# EAGLE board RF-STM32 v67 (EAGLE 9.7.0)
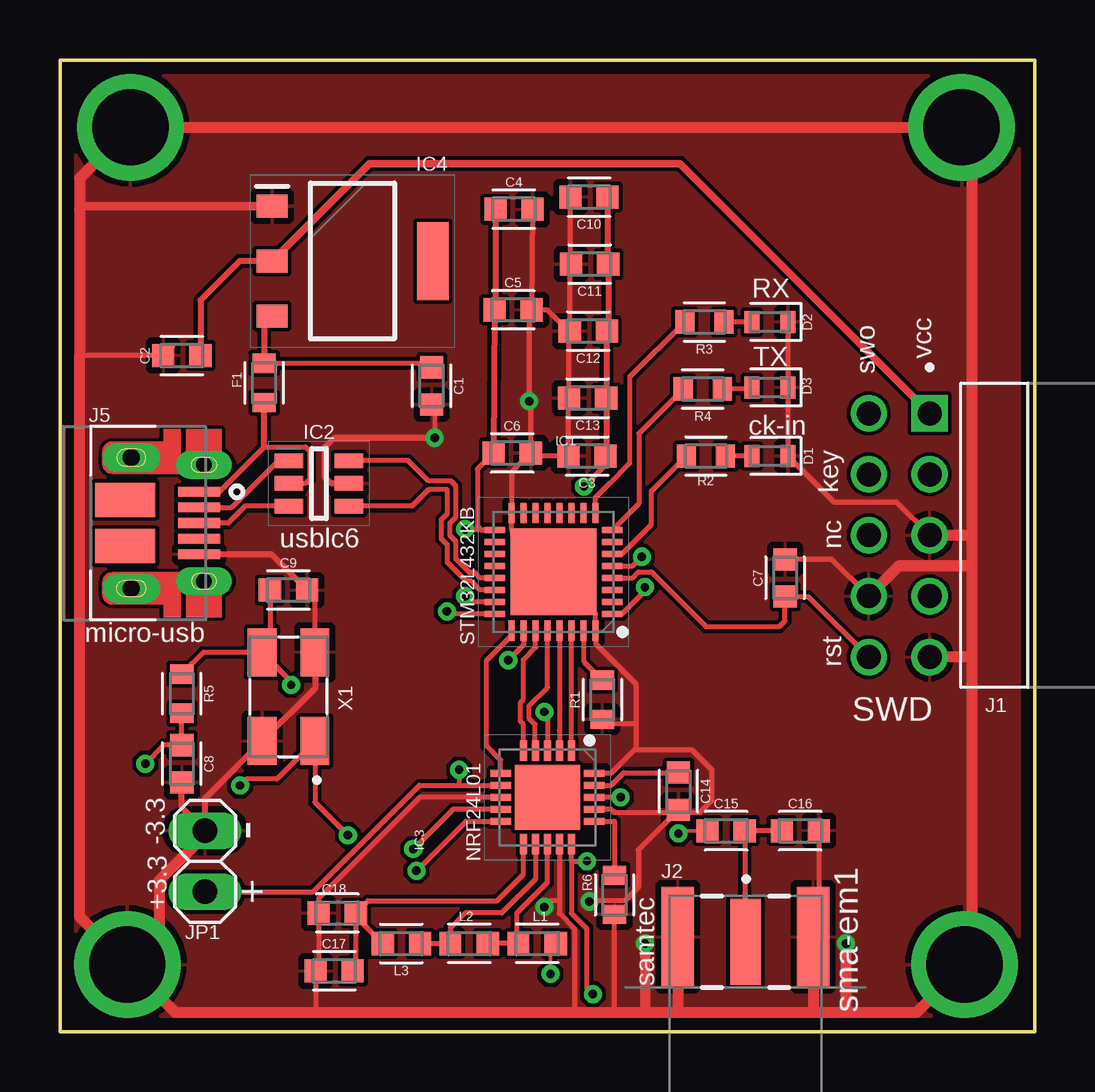
[diagram p0: board, top side]
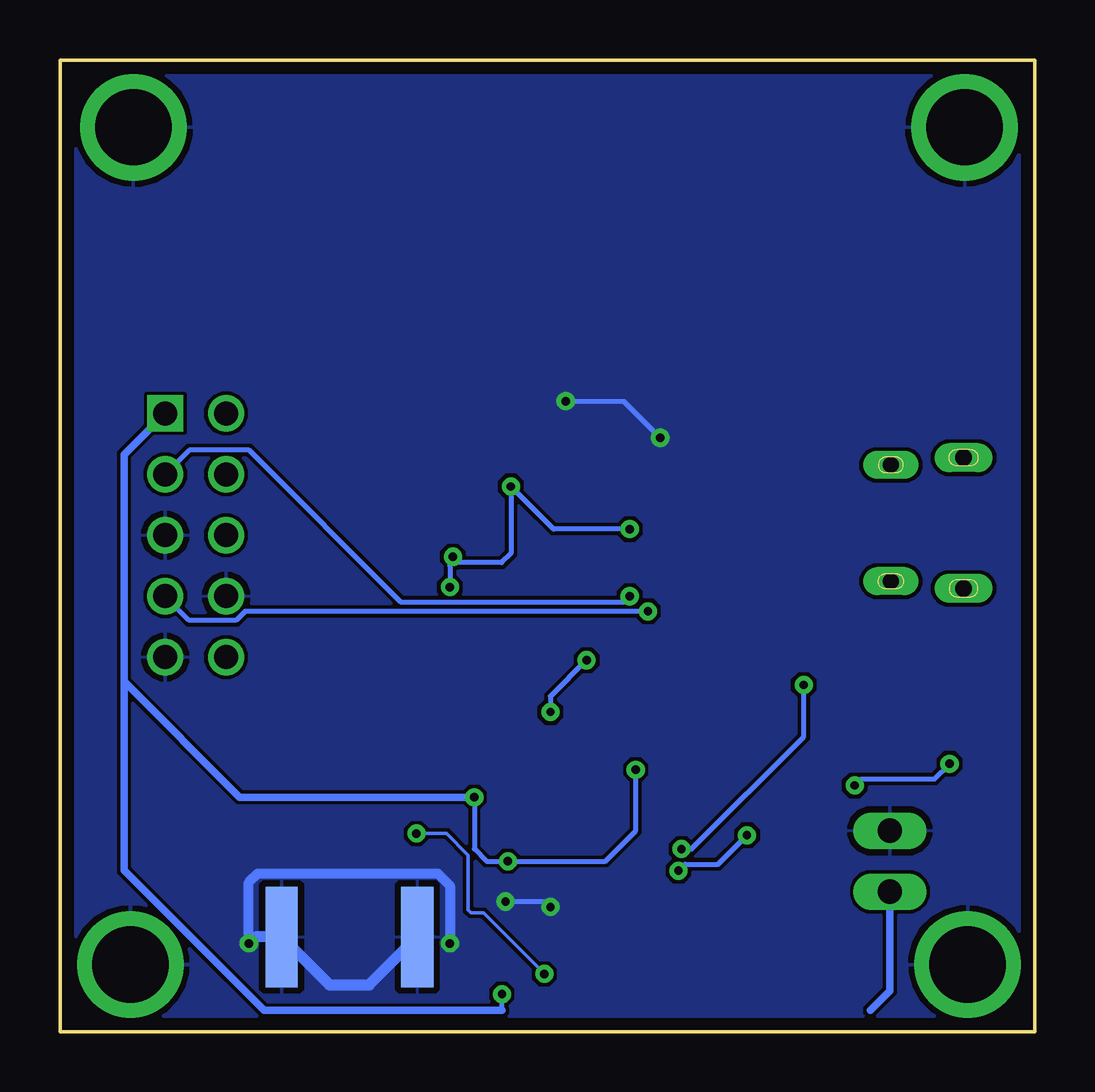
[diagram p1: board, bottom side, seen from below]

Size 40.64 x 40.51 mm. Coordinates in mm from the lower left corner, seen from the top.
Outline: 0,0 0,40.51 40.64,40.51 40.64,0 0,0
Copper layers (1*16): Top 0.035mm / dielectric 1.5mm / Bottom 0.035mm
Design rules "default *": minimum track width 6mil, minimum drill 0.35mm, track to track 6mil, track to pad 6mil, pad to pad 6mil, via to via 6mil, smd to smd 6mil, copper to edge 20mil, drill to drill 1mil, minimum pad ring 10mil, minimum via ring 8mil, stop-mask expansion 6mil, vias tented up to drill 0mil, thermal gap 10mil

## Footprints (pad centres in the part's own frame; a part is rotated, then mirrored left to right if it is on the bottom)
CAPC1608X85 = smd 0.921 x 0.97: 1 -0.775,0; 2 0.775,0
LEDC1608X95N_RND-R = smd 0.612 x 0.912: A 0.75,0; C -0.75,0
FUSC1608X60N = smd 0.799 x 0.974: 1 -0.815,0; 2 0.815,0
QFN50P500X500X60-33N = smd 0.85 x 0.25: 1 -2.45,1.75; 2 -2.45,1.25; 3 -2.45,0.75; 4 -2.45,0.25; 5 -2.45,-0.25; 6 -2.45,-0.75; 7 -2.45,-1.25; 8 -2.45,-1.75; 17 2.45,-1.75; 18 2.45,-1.25; 19 2.45,-0.75; 20 2.45,-0.25; 21 2.45,0.25; 22 2.45,0.75; 23 2.45,1.25; 24 2.45,1.75 | smd 0.25 x 0.85: 9 -1.75,-2.45; 10 -1.25,-2.45; 11 -0.75,-2.45; 12 -0.25,-2.45; 13 0.25,-2.45; 14 0.75,-2.45; 15 1.25,-2.45; 16 1.75,-2.45; 25 1.75,2.45; 26 1.25,2.45; 27 0.75,2.45; 28 0.25,2.45; 29 -0.25,2.45; 30 -0.75,2.45; 31 -1.25,2.45; 32 -1.75,2.45 | smd 3.6 x 3.6: 33 0,0
SOT95P280X145-6N = smd 1.2 x 0.6: 1 -1.25,0.95; 2 -1.25,0; 3 -1.25,-0.95; 4 1.25,-0.95; 5 1.25,0; 6 1.25,0.95
QFN50P400X400X95-21N = smd 0.85 x 0.3: 1 -1.95,1; 2 -1.95,0.5; 3 -1.95,0; 4 -1.95,-0.5; 5 -1.95,-1; 11 1.95,-1; 12 1.95,-0.5; 13 1.95,0; 14 1.95,0.5; 15 1.95,1 | smd 0.3 x 0.85: 6 -1,-1.95; 7 -0.5,-1.95; 8 0,-1.95; 9 0.5,-1.95; 10 1,-1.95; 16 1,1.95; 17 0.5,1.95; 18 0,1.95; 19 -0.5,1.95; 20 -1,1.95 | smd 2.7 x 2.7: 21 0,0
SOT229P700X180-4N = smd 1.3 x 0.95: 1 -3.35,2.29; 2 -3.35,0; 3 -3.35,-2.29 | smd 1.3 x 3.25: 4 3.35,0
TE_826953-5 = drill 1 pad 1.35: CLK 7.62,0; GND0 5.08,0; GND1 10.16,0; GNDD 7.62,-2.54; KEY 2.54,-2.54; NC 5.08,-2.54; RST 10.16,-2.54; SWIO 2.54,0; SWO 0,-2.54 | drill 1 pad 1.35 square: VCC 0,0
SAMTEC_SMA-J-P-H-ST-EM1 = smd 1.27 x 3.6: 1 0,0 | smd 1.35 x 4.2: 2_1 -2.825,0.2; 3_1 2.825,0.2 | smd 1.35 x 4.2 bottom: 2_2 -2.825,0.2; 3_2 2.825,0.2
10103594 = smd 0.4 x 1.75: 1 -1.3,2.825; 2 -0.65,2.825; 3 0,2.825; 4 0.65,2.825; 5 1.3,2.825 | smd 1.425 x 2.5: 6 -0.963,-0.25; 7 0.963,-0.25 | drill 0.65 pad 0.73 long: SH1 -2.425,3.03; SH2 2.425,3.03 | drill 0.7 long: SH3 -2.725,0; SH4 2.725,0
1X02 = drill 1.016 long: 1 -1.27,0; 2 1.27,0
INDC1608X95N = smd 0.9 x 0.97: 1 -0.785,0 | smd 0.933 x 0.97: 2 0.769,0
BEAGLEBONEBLACK_MOUNTING_HOLE = drill 3.175 pad 4.445: P$1 0,0
RESC1608X60 = smd 0.799 x 0.974: 1 -0.815,0; 2 0.815,0
7B-16.000MAAJ-T = smd 2 x 1.2: 1 -1.85,-1.1; 2 1.85,-1.1; 3 1.85,1.1; 4 -1.85,1.1

## Placement (x,y rotation side)
C1  10uf  [CAPC1608X85]  15.49,26.92 270 top
C2  10uf  [CAPC1608X85]  5.08,28.19 180 top
C3  1u  [CAPC1608X85]  21.97,24 180 top
C4  0.1u  [CAPC1608X85]  18.92,34.29 0 top
C5  0.1u  [CAPC1608X85]  18.89,30.1 0 top
C6  0.1u  [CAPC1608X85]  18.85,24.13 0 top
C7  0.1u  [CAPC1608X85]  30.23,18.92 90 top
C8  10p  [CAPC1608X85]  5.08,11.18 270 top
C9  10p  [CAPC1608X85]  9.53,18.41 0 top
C10  10n  [CAPC1608X85]  22.05,34.8 180 top
C11  10n  [CAPC1608X85]  22.08,32 180 top
C12  10n  [CAPC1608X85]  22.03,29.21 180 top
C13  10n  [CAPC1608X85]  22,26.42 180 top
C14  10n  [CAPC1608X85]  25.78,10.03 270 top
C15  1p5  [CAPC1608X85]  27.77,8.38 0 top
C16  1p  [CAPC1608X85]  30.86,8.38 0 top
C17  2n2  [CAPC1608X85]  11.43,2.54 0 top
C18  4p7  [CAPC1608X85]  11.56,4.95 0 top
D1  CHIP-ROUND-R_0603-1MM  [LEDC1608X95N_RND-R]  29.59,24 180 top
D2  CHIP-ROUND-R_0603-1MM  [LEDC1608X95N_RND-R]  29.59,29.59 180 top
D3  CHIP-ROUND-R_0603-1MM  [LEDC1608X95N_RND-R]  29.59,26.86 180 top
F1  FUSE  [FUSC1608X60N]  8.51,27.05 90 top
IC1  STM32L432KBU6  [QFN50P500X500X60-33N]  20.57,19.18 180 top
IC2  USBLC6-2SC6  [SOT95P280X145-6N]  10.79,22.86 180 top
IC3  NRF24L01  [QFN50P400X400X95-21N]  20.32,9.78 270 top
IC4  AMS1117  [SOT229P700X180-4N]  12.19,32.13 0 top
J1  826953-5  [TE_826953-5]  36.25,25.78 270 top
J2  SMA-J-P-H-ST-EM1  [SAMTEC_SMA-J-P-H-ST-EM1]  28.57,3.75 0 top
J5  10103594  [10103594]  2.97,21.21 270 top
JP1  PINHD-1X2  [1X02]  6.05,7.11 90 top
L1  3n9  [INDC1608X95N]  19.89,3.68 0 top
L2  8n2  [INDC1608X95N]  17.06,3.68 0 top
L3  2n7  [INDC1608X95N]  14.22,3.68 180 top
MGT1  MOUNTING_HOLE  [BEAGLEBONEBLACK_MOUNTING_HOLE]  2.93,37.71 0 top
MGT2  MOUNTING_HOLE  [BEAGLEBONEBLACK_MOUNTING_HOLE]  37.58,37.71 0 top
MGT3  MOUNTING_HOLE  [BEAGLEBONEBLACK_MOUNTING_HOLE]  2.81,2.81 0 top
MGT4  MOUNTING_HOLE  [BEAGLEBONEBLACK_MOUNTING_HOLE]  37.71,2.81 0 top
R1  10k  [RESC1608X60]  22.61,13.84 90 top
R2  10k  [RESC1608X60]  26.92,24 180 top
R3  2k2  [RESC1608X60]  26.86,29.59 180 top
R4  2k2  [RESC1608X60]  26.8,26.8 180 top
R5  1m  [RESC1608X60]  5.08,14.1 270 top
R6  10k  [RESC1608X60]  23.11,5.71 90 top
X1  7B-16.000MAAJ-T  [7B-16.000MAAJ-T]  9.53,13.97 90 top

## Library data of the parts
C1-C18 = Capacitor; CATEGORY: Capacitor
D1-D3 = LED; CATEGORY: LED; COLOR: RED; DESCRIPTION: CHIP LED ROUND; SUB-CATEGORY: CHIP; TYPE: ROUND_TOP
F1 = Circuit-Protection; CATEGORY: Circuit-Protection; SUB-CATEGORY: Fuse
IC1 = STM32L432KBU6/UFQFPN; ARROW_PART_NUMBER: STM32L432KBU6; ARROW_PRICE-STOCK: https://www.arrow.com/en/products/stm32l432kbu6/stmicroelectronics; DESCRIPTION: ARM Microcontrollers - MCU Ultra-low-power with FPU ARM Cortex-M4 MCU 80 MHz with 256 Kbytes Flash, USB; HEIGHT: 0.6mm; MANUFACTURER_NAME: STMicroelectronics; MANUFACTURER_PART_NUMBER: STM32L432KBU6; MOUSER_PART_NUMBER: 511-STM32L432KBU6; MOUSER_PRICE-STOCK: https://www.mouser.co.uk/ProductDetail/STMicroelectronics/STM32L432KBU6/?qs=qzCNEk%252BRr%252BbQvfxQ4ZNP4A%3D%3D
IC2 = USBLC6-2SC6; ARROW_PART_NUMBER: USBLC6-2SC6; ARROW_PRICE-STOCK: https://www.arrow.com/en/products/usblc6-2sc6/stmicroelectronics; DESCRIPTION: TVS Diode Array Uni-Directional USBLC6-2SC6 17V, SOT-23 6-Pin; HEIGHT: 1.45mm; MANUFACTURER_NAME: STMicroelectronics; MANUFACTURER_PART_NUMBER: USBLC6-2SC6; MOUSER_PART_NUMBER: 511-USBLC6-2SC6; MOUSER_PRICE-STOCK: https://www.mouser.co.uk/ProductDetail/STMicroelectronics/USBLC6-2SC6?qs=po45yt2pPpu%2FhNIlwQdTlg%3D%3D
IC3 = NRF24L01-QFN-20pin; ARROW_PART_NUMBER: NRF24L01; ARROW_PRICE-STOCK: https://www.arrow.com/en/products/nrf24l01/nordic-semiconductor; DESCRIPTION: RF Transceiver 1.9-3.6V 2.4GHz XCVR ENHNCD SHCKBRST; HEIGHT: 0.95mm; MANUFACTURER_NAME: Nordic Semiconductor; MANUFACTURER_PART_NUMBER: NRF24L01; MOUSER_PART_NUMBER: 949-NRF24L01; MOUSER_PRICE-STOCK: https://www.mouser.co.uk/ProductDetail/Nordic-Semiconductor/nRF24L01?qs=yd0qOhnSiDdtPhpOyQGKeQ%3D%3D
IC4 = AMS1117; DESCRIPTION: 1117; HEIGHT: 1.8mm; MANUFACTURER_NAME: Advanced Monolithic Systems; MANUFACTURER_PART_NUMBER: AMS1117
J1 = Header-right-25pin-2.54mm; COMMENT: 826953-5; EU_ROHS_COMPLIANCE: Compliant
J2 = SMA-J-P-H-ST-EM1; MANUFACTURER: Samtec; MAXIMUM_PACKAGE_HEIGHT: 3.675mm; PARTREV: G; STANDARD: Manufacturer Recommendations
J5 = Connector_USB; CATEGORY: Connectors; CONTACTS: 5; CURRENT-RATING: 1.8A; DESCRIPTION: CONN RCPT USB2.0 MICRO B SMD R/A; GENDER: Receptacle; MANUFACTURER: Amphenol ICC (FCI); MOUNT_TYPE: R/A; MPN: 10103594-0001LF; OPERATING_TEMPERATURE: -30°C ~ 80°C; PART_STATUS: ACTIVE; ROHS_COMPLIANT: COMPLIANT; SUB_CATEGORY: USB; TYPE: USB-micro B; VOLTAGE-RATING: 100VAC
JP1 = Connector; CATEGORY: CONNECTOR; SUB-CATEGORY: PIN-HEADER
L1-L3 = Inductor; CATEGORY: Inductor; SUB-CATEGORY: Fixed
MGT1-MGT4 = BeagleBone_Blue_R3
R1-R6 = Resistor; CATEGORY: Resistor; SUB-CATEGORY: Fixed
X1 = Crystals_Oscillators; CRAETED_BY: PCBLayout.com; DIGIKEY_PART_NUMBER: 887-1104-2-ND; MANUFACTURER: TXC CORPORATION; MPN: 7B-16.000MAAJ-T; PACKAGE: SMD 4

## Nets
+3.3V: C2.1 IC3.7 IC3.15 IC3.18 IC4.2 J1.VCC JP1.1
+3V3: C3.1 C4.1 C5.1 C6.1 C10.1 C11.1 C12.1 C13.1 IC1.1 IC1.5 IC1.17
+5V: F1.1 IC2.5 J5.1
ANT1: IC3.12 L2.1 L3.1
ANT2: IC3.13 L1.1 L2.2
BOOT0: IC1.31 R1.2
CE: IC1.30 IC3.1
CSN: IC1.29 IC3.2
D+: IC2.6 J5.3
D-: IC2.4 J5.2
DVDD: C14.1 IC3.19
EP: IC3.21
GND: C1.2 C2.2 C3.2 C4.2 C5.2 C6.2 C7.2 C8.2 C9.2 C10.2 C11.2 C12.2 C13.2 C14.2 C16.2 C17.1 C18.1 D1.C D2.C D3.C IC1.16 IC1.32 IC1.33 IC2.2 IC3.8 IC3.14 IC3.17 IC3.20 IC4.1 J1.GND0 J1.GND1 J1.GNDD J2.2_1 J2.2_2 J2.3_1 J2.3_2 J5.5 JP1.2 MGT1.P$1 MGT2.P$1 MGT3.P$1 MGT4.P$1 R1.1 R6.1 X1.2 X1.4
IREF: IC3.16 R6.2
IRQ: IC1.25 IC3.6
MISO: IC1.27 IC3.5
MOSI: IC1.28 IC3.4
N$1: C1.1 F1.2 IC4.3
N$3: D1.A R2.1
N$8: C15.1 L1.2
N$9: C15.2 C16.1 J2.1
N$11: D2.A R3.1
N$12: D3.A R4.1
NRST: C7.1 IC1.4 J1.RST
PA0: IC1.6 R2.2
PA1: IC1.7
PA4: IC1.10
PA5: IC1.11
PA6: IC1.12
PA7: IC1.13
PA8: IC1.18
PA9: IC1.19
PA10: IC1.20
PB0: IC1.14
PB1: IC1.15
RX: IC1.9 R3.2
SCK: IC1.26 IC3.3
SWDCLK: IC1.24 J1.CLK
SWDIO: IC1.23 J1.SWIO
TX: IC1.8 R4.2
USB_N: IC1.21 IC2.3
USB_P: IC1.22 IC2.1
VDD_PA: C17.2 C18.2 IC3.11 L3.2
XC1: C8.1 IC3.10 R5.2 X1.1
XC2: C9.1 IC3.9 R5.1 X1.3

## Tracks (layer width: path | path; a pad name or v marks a point on that pad's centre or on a via)
+3.3V  (via drill 0.35)
  Top 0.203: 21.32,7.11 IC3.15 | 16.64,10.28 14.98,10.28 10.55,5.84 JP1.1 | 16.64,10.28 IC3.7 | v23.37,9.78 IC3.18 | 21.32,7.11 v21.97,7.11 | v16.64,10.92 16.64,10.28 | 21.32,7.11 21.32,4.94 21.95,4.3 21.95,1.83 v22.21,1.57
  Top 0.254: IC4.2 7.49,32.13 5.86,30.49 C2.1
  Top 0.305: IC4.2 12.91,36.2 25.84,36.2 J1.VCC
  Bottom 0.203: v23.37,9.78 23.37,7.62 22.86,7.11 v21.97,7.11 17.91,7.11 16.64,8.38 v16.64,10.92 | 22.21,0.89 v22.21,1.57
  Bottom 0.305: 37.97,14.61 33.15,9.78 v23.37,9.78 | 37.97,14.61 37.97,6.73 32.13,0.89 22.21,0.89 | 6.86,0.89 6.04,1.7 JP1.1 | J1.VCC 37.97,24.06 37.97,14.61
+3V3  (via drill 0.35)
  Top 0.203: C6.1 17.4,23.45 17.4,21.08 17.55,20.93 IC1.17 16.92,20.93 v16.89,20.95 | v21.84,22.73 22.77,23.66 22.77,24.03 | IC1.5 23.88,19.43 23.98,19.53 v24.26,19.8 | IC1.1 23.43,17.43 24.38,18.38 v24.38,18.54
  Top 0.254: C10.1 22.83,32.03 C11.1 22.85,29.26 C12.1 22.77,29.18 C13.1 22.77,24.03 C3.1 | C6.1 C5.1 18.15,30.14 C4.1
  Bottom 0.203: v16.89,20.95 20.07,20.95 v21.84,22.73 21.84,19.94 22.23,19.56 24.26,19.56 | 24.26,19.56 v24.26,19.8 | 24.26,19.56 24.38,19.43 v24.38,18.54
+5V
  Top 0.203: IC2.5 10.23,22.86 10.4,23.02 10.4,24.21 10.23,24.38 8.51,24.38 | 8.51,24.38 8.51,24.46 | J5.1 6.63,22.51 8.51,24.38
  Top 0.254: 8.51,24.46 F1.1
ANT1
  Top 0.203: IC3.12 19.82,6.36 18.41,4.95 16.89,4.95 16.27,4.34 L2.1 L3.1
ANT2
  Top 0.203: 19.08,3.71 19.05,3.74 19.05,4.96 20.32,6.23 IC3.13 | 19.08,3.71 L1.1 | L2.2 17.86,3.71 19.08,3.71
BOOT0
  Top 0.203: IC1.31 21.84,16.71 21.84,15.42 R1.2
CE
  Top 0.203: IC3.1 IC1.30
CSN
  Top 0.203: IC3.2 20.82,12.56 20.82,13.72 IC1.29
D+
  Top 0.203: IC2.6 7.71,21.91 7.21,21.41 7.01,21.21 J5.3
D-
  Top 0.203: IC2.4 9.11,23.81 7.16,21.86 J5.2
DVDD
  Top 0.203: C14.1 25.77,10.79 23.49,10.79 22.97,10.28 IC3.19
GND  (via drill 0.35)
  Top 0.203: 4.7,28.58 C2.2 0.81,28.19 | 19.49,24.13 C6.2 | C10.2 21.28,32.03 C11.2 21.25,31.95 C12.2 21.22,29.18 | 21.22,29.18 C13.2 21.2,26.39 C3.2 19.75,24 C6.2 | C4.2 C5.2 | C1.2 15.62,26.02 v15.62,24.77 | X1.2 10.62,18.09 C9.2 | 10.54,0.81 10.65,0.93 C17.1 10.78,2.67 C18.1 10.78,5.58 14.99,9.78 IC3.8 | IC3.14 20.82,5.46 | C16.2 31.64,3.92 31.4,3.68 | 23.11,0.81 R6.1 | IC3.17 22.97,9.28 23.11,9.15 25.4,9.15 | 25.4,9.15 25.67,9.15 C14.2 24.11,7.59 24.11,6.03 23.54,5.46 22.1,5.46 v22.07,5.43 | v20.19,5.21 20.45,5.46 20.82,5.46 | C6.2 19.62,26.22 v19.56,26.29 19.56,30 C5.2 | C5.2 20.31,30.1 21.22,29.18 | 23.94,11.75 24,11.81 24,12.83 | 23.94,11.75 22.97,10.78 IC3.20 | 24,12.83 24,14.51 22.32,16.19 IC1.32 22.32,17.43 IC1.33 18.82,20.93 IC1.16 18.82,23.33 C6.2 | R1.1 22.81,12.83 24,12.83 | D2.C D3.C D1.C 32.25,22.09 34.86,22.09 J1.GND0 | C7.2 32.18,19.7 J1.GNDD | 25.4,9.15 25.4,9.14 26.67,9.14 27.18,9.65 27.18,10.92 26.35,11.75 23.94,11.75 | 20.82,5.46 20.82,4.94 21.45,4.3 21.45,0.81
  Top 0.254: X1.2 10.62,14.32 X1.4 6.04,9.74 JP1.2 5.08,9.35 C8.2 | C9.2 8.81,19.91 J5.5 | IC2.2 11.3,22.86 11.05,23.11 11.05,24.38 11.43,24.77 v15.62,24.77
  Top 0.356: IC4.1 0.94,34.42 0.81,34.29
  Top 0.406: v24.38,3.68 24.38,0.81
  Top 0.457: 25.78,0.81 31.5,0.81 | 31.5,0.81 32.77,0.81 | 32.77,0.81 35.71,0.81 MGT4.P$1 38.02,3.12 38.02,15.62 | J2.2_1 25.75,0.84 25.78,0.81 | J2.3_1 31.4,3.68 31.4,0.91 31.5,0.81 | v32.77,3.68 32.77,0.81 | JP1.2 6.04,8.22 4.14,6.32 4.14,4.14 MGT3.P$1 | 25.78,0.81 24.38,0.81 23.11,0.81 21.45,0.81 10.54,0.81 4.8,0.81 MGT3.P$1 | 38.02,15.62 38.02,19.43 | 38.02,15.62 J1.GND1 | MGT3.P$1 0.81,4.8 0.81,28.19 0.81,34.29 0.81,35.59 MGT1.P$1 MGT2.P$1 37.58,37.45 38.02,37.01 38.02,20.7 | 38.02,19.43 38.02,20.7 | J1.GNDD 34.98,19.43 38.02,19.43 | J1.GND0 38.02,20.7
  Bottom 0.203: v19.56,26.29 17.14,26.29 v15.62,24.77 | v22.07,5.43 20.42,5.43 v20.19,5.21
  Bottom 0.406: v32.77,3.68 32.77,6.22 32.38,6.6 24.89,6.6 24.38,6.1 v24.38,3.68
  Bottom 0.457: v32.77,3.68 32.49,3.95 J2.3_1 29.4,1.96 27.75,1.96 J2.2_1
  pour Top: 0,40.64 40.64,40.64 40.64,0 0,0
  pour Bottom: 0,40.64 40.64,40.64 40.64,0 0,0
IREF
  Top 0.203: IC3.16 23.11,8.78 R6.2
IRQ
  Top 0.203: IC3.6 18.37,11.34 17.78,11.93 17.78,15.48 18.82,16.52 IC1.25
MISO
  Top 0.203: IC1.27 19.82,16.01 19.32,15.51 19.32,13.86 19.2,13.74 19.2,12.93 19.32,12.81 IC3.5
MOSI
  Top 0.203: IC3.4 19.81,12.82 19.56,13.07 19.56,13.6 20.32,14.36 IC1.28
N$1
  Top 0.203: F1.2 15.33,27.87 C1.1
  Top 0.254: IC4.3 8.51,29.51 F1.2
N$3
  Top 0.203: D1.A R2.1
N$8  (via drill 0.35)
  Top 0.152: L1.2 20.45,3.47 v20.45,2.41 | C15.1 25.9,8.38 v25.78,8.27
  Bottom 0.152: v20.45,2.41 22.99,4.95 23.5,4.95 23.62,5.08 23.62,7.37 24.52,8.27 v25.78,8.27
N$9
  Top 0.203: C16.1 C15.2 28.54,3.79 J2.1
N$11
  Top 0.203: D2.A R3.1
N$12
  Top 0.203: D3.A 28.78,26.8 R4.1
NRST
  Top 0.203: J1.RST 31.19,18.15 C7.1 30.23,17.13 29.98,16.89 26.93,16.89 24.65,19.17 24.12,19.17 23.88,18.93 IC1.4
PA0
  Top 0.203: R2.2 24.64,22.53 24.64,21.13 23.43,19.93 IC1.6
RX
  Top 0.203: R3.2 23.75,27.3 23.75,23.7 22.88,22.84 22.32,22.28 IC1.9
SCK  (via drill 0.35)
  Top 0.203: IC1.26 19.32,16.13 v18.69,15.49 | IC3.3 20.32,13.21 v20.19,13.34
  Bottom 0.203: v20.19,13.34 20.19,13.99 v18.69,15.49
SWDCLK  (via drill 0.35)
  Top 0.203: IC1.24 16.23,17.43 v16.13,17.53
  Bottom 0.203: v16.13,17.53 32.92,17.53 33.3,17.15 35.25,17.15 J1.CLK
SWDIO  (via drill 0.35)
  Top 0.203: IC1.23 17.12,17.93 v16.89,18.16
  Bottom 0.203: J1.SWIO 35.25,24.25 32.76,24.25 26.42,17.91 17.14,17.91 v16.89,18.16
TX
  Top 0.203: R4.2 24.13,24.95 24.13,22.03 IC1.8
USB_N
  Top 0.203: IC2.3 14.52,23.81 15.37,22.96 16.3,22.96 16.51,22.75 16.51,21.47 16.26,21.22 16.26,20.69 16.51,20.44 16.51,19.71 17.07,19.15 17.3,19.15 17.52,18.93 IC1.21
USB_P
  Top 0.203: IC2.1 14.67,21.91 15.37,22.61 16.15,22.61 16.15,21.61 15.9,21.36 15.9,20.55 16.15,20.3 16.15,19.56 16.93,18.79 17.15,18.79 17.52,18.43 IC1.22
VDD_PA
  Top 0.203: IC3.11 19.32,6.56 18.22,5.46 12.84,5.46 C18.2 12.33,4.81 | 12.33,4.81 12.33,2.67 C17.2 | L3.2 12.33,4.81
XC1  (via drill 0.35)
  Top 0.203: R5.2 C8.1 4.33,11.95 v3.56,11.18 | IC3.10 16.92,8.78 v14.86,6.71 | v12,8.19 10.62,9.57 X1.1 9.05,10.54 7.78,10.54 v7.51,10.27
  Bottom 0.203: v3.56,11.18 4.19,10.54 7.24,10.54 v7.51,10.27 | v14.86,6.71 14.58,6.99 13.21,6.99 v12,8.19
XC2  (via drill 0.35)
  Top 0.203: X1.3 5.99,15.82 R5.1 | C9.1 8.75,16.14 X1.3 | X1.3 9.63,14.61 v9.63,14.46 | IC3.9 16.39,9.28 v14.73,7.62
  Bottom 0.203: v14.73,7.62 14.31,7.62 9.63,12.3 v9.63,14.46

## Text on the board
tNames: RX | TX | swo | vcc | ck-in | key | nc | usblc6 | rst | micro-usb | STM32L432KB | SWD | -3.3 | - | NRF24L01 | sma-em1 | +3.3 | + | samtec